# EAGLE board mippe_mobo (EAGLE 9.5.2)
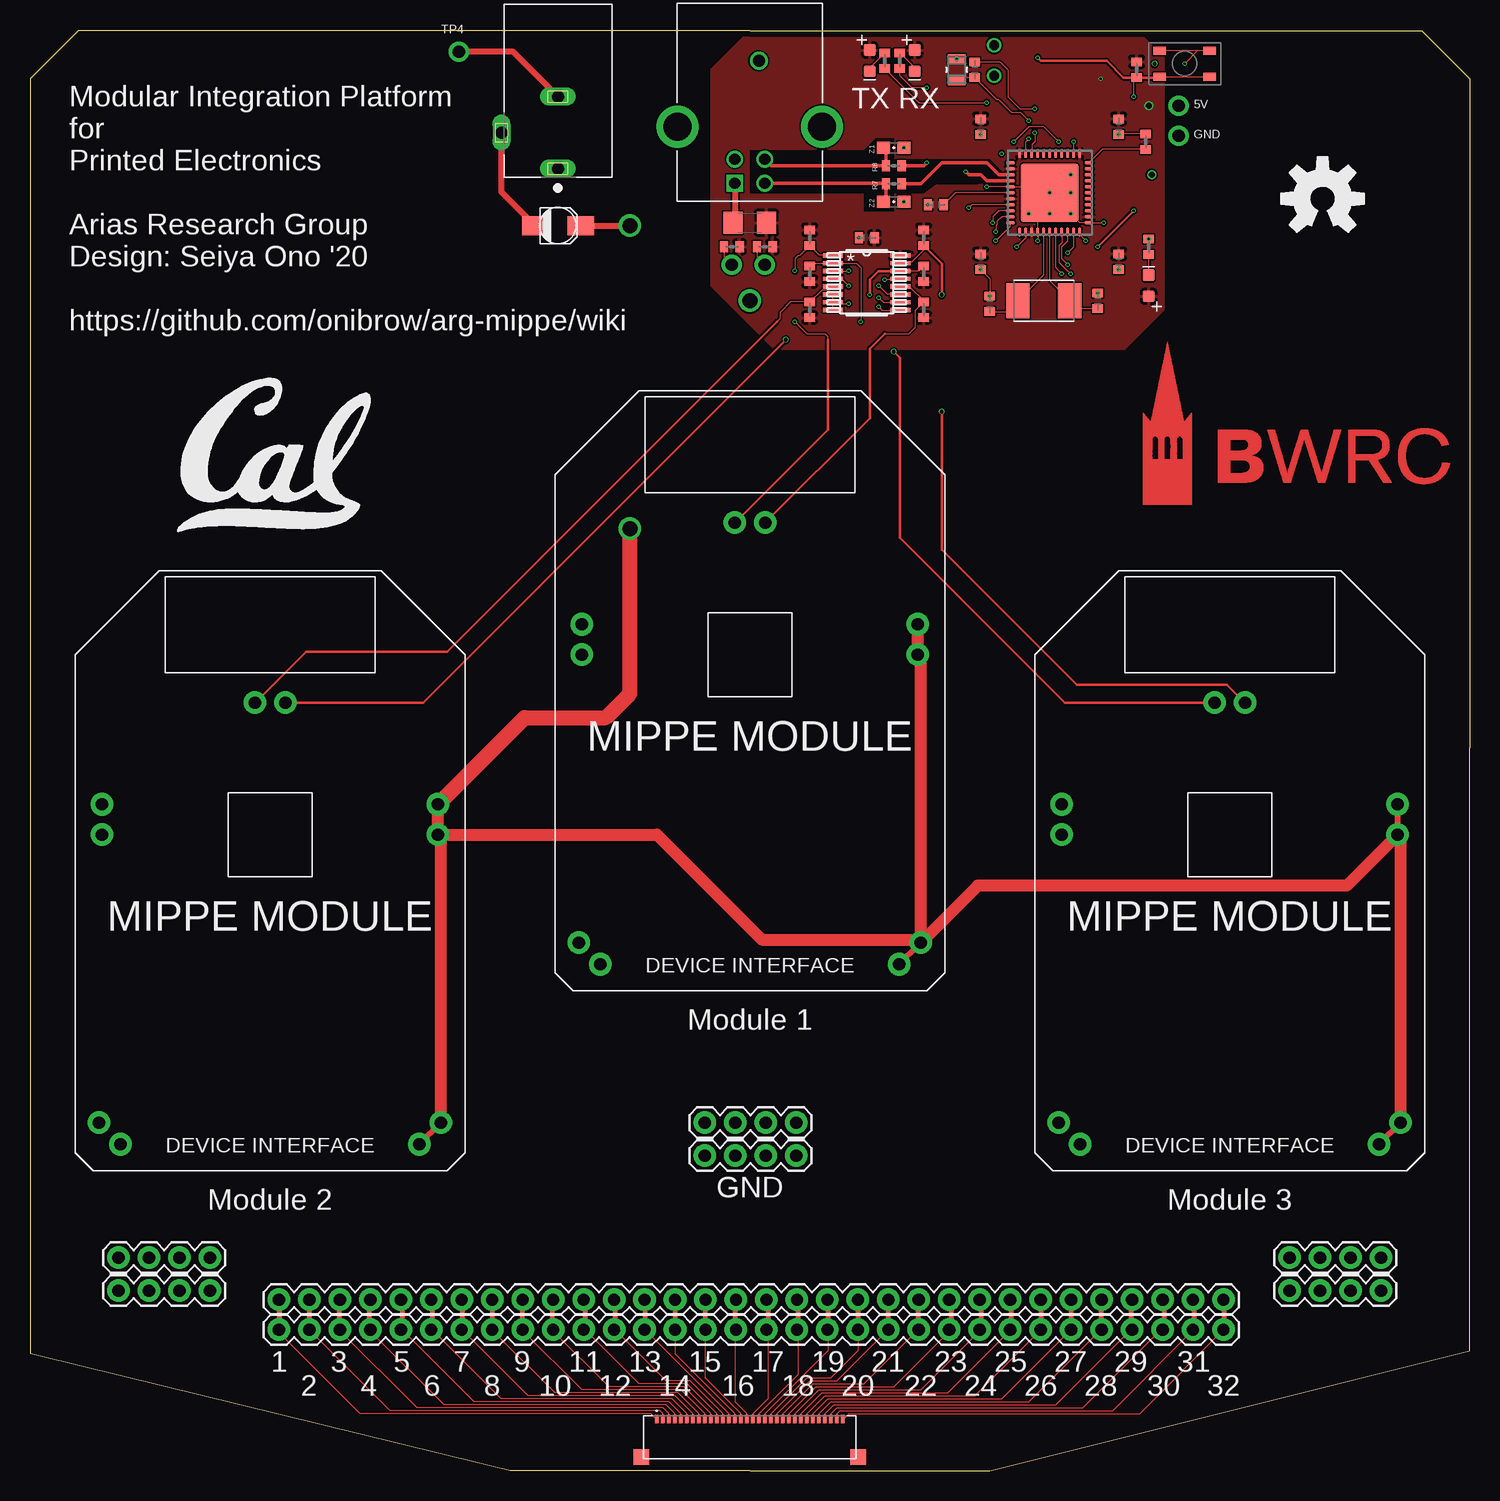
[diagram p0: board, top side]
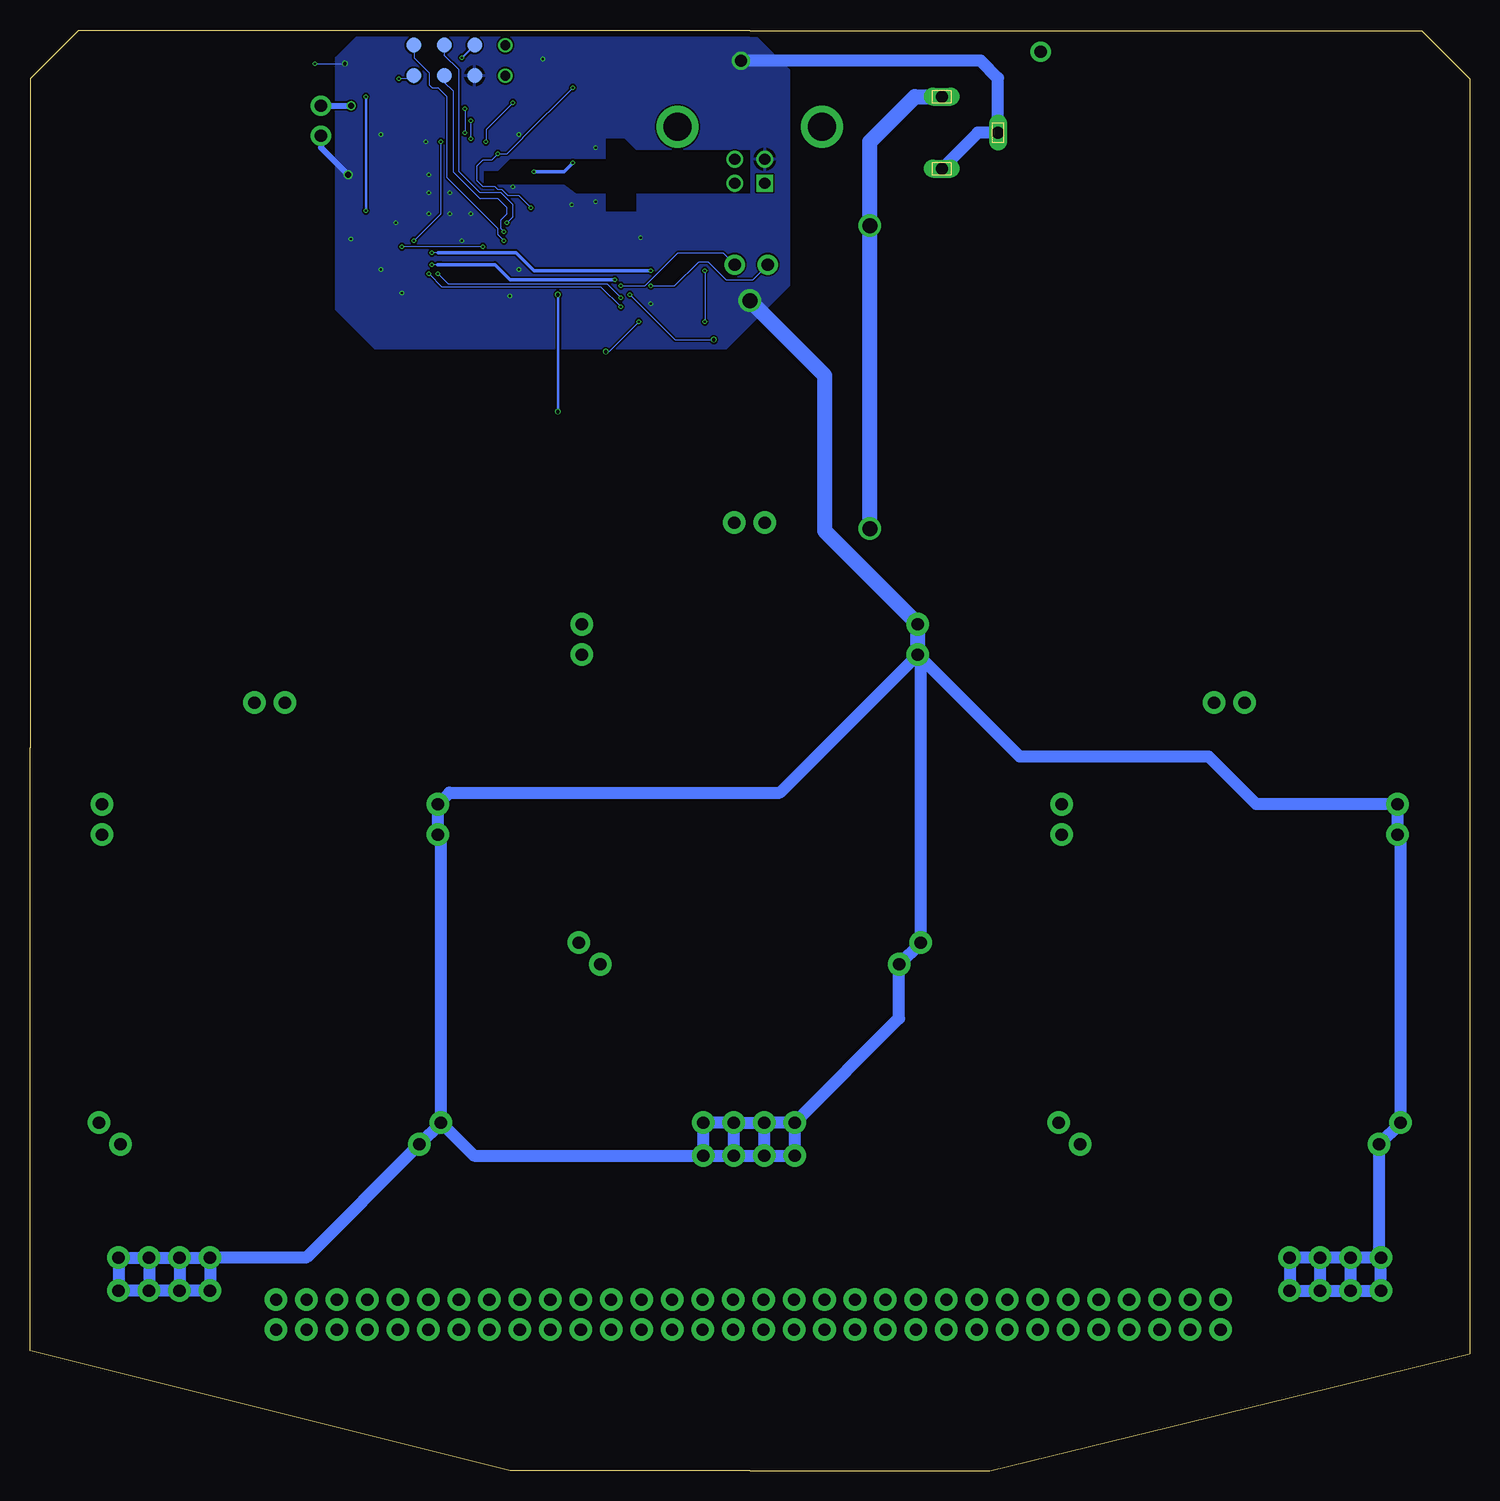
[diagram p1: board, bottom side, seen from below]

Size 120 x 120 mm. Coordinates in mm from the lower left corner, seen from the top.
Outline: 60,0 80,0 120,10 120,60.25 120,116 116,120 60,120 4,120 0,116 0,60 0,9.75 40,0 60,0
Copper layers (1*16): Top 2mil / dielectric 9mil / Bottom 2mil
Design rules "scono": minimum track width 3.5mil, minimum drill 0.2mm, track to track 5.5mil, track to pad 5.5mil, pad to pad 5.5mil, via to via 5.5mil, smd to smd 0mil, copper to edge 0.5mm, drill to drill 0.5mm, minimum pad ring 3mil, minimum via ring 3mil, stop-mask expansion 3mil, vias tented up to drill 0mil, thermal gap 10mil
Net classes: 1 supply: width 0.152 mm, drill 0.152 mm, clearance 0.152 mm
bKeepout: 1 lines
tRestrict: 23 lines
bRestrict: 24 lines

## Footprints (pad centres in the part's own frame; a part is rotated, then mirrored left to right if it is on the bottom)
MIPPE_MOD = drill 1.016 pad 1.88: GND@0 -12.454,2.204; GND@1 -14.25,4; GND@2 -14,28; GND@3 -14,30.54; RX -1.25,39; TX 1.29,39; VCC@0 12.454,2.204; VCC@1 14.25,4; VCC@2 14,28; VCC@3 14,30.54
0402-CAP = smd 0.7 x 0.9: 1 -0.65,0; 2 0.65,0
CAP_3MM = smd 1.6 x 2.2: NEG 0,-1.9; POS 0,1.9
LED-0603 = smd 1 x 1: A 0.877,0; C -0.877,0
1206 = smd 1.6 x 1.8: 1 -1.4,0; 2 1.4,0
1X32 = drill 1.016 pad 1.88: 1 0,0; 2 2.54,0; 3 5.08,0; 4 7.62,0; 5 10.16,0; 6 12.7,0; 7 15.24,0; 8 17.78,0; 9 20.32,0; 10 22.86,0; 11 25.4,0; 12 27.94,0; 13 30.48,0; 14 33.02,0; 15 35.56,0; 16 38.1,0; 17 40.64,0; 18 43.18,0; 19 45.72,0; 20 48.26,0; 21 50.8,0; 22 53.34,0; 23 55.88,0; 24 58.42,0; 25 60.96,0; 26 63.5,0; 27 66.04,0; 28 68.58,0; 29 71.12,0; 30 73.66,0; 31 76.2,0; 32 78.74,0
MOLEX_503480-3200 = smd 0.3 x 0.7: 1 -7.75,1.8; 2 -7.25,1.8; 3 -6.75,1.8; 4 -6.25,1.8; 5 -5.75,1.8; 6 -5.25,1.8; 7 -4.75,1.8; 8 -4.25,1.8; 9 -3.75,1.8; 10 -3.25,1.8; 11 -2.75,1.8; 12 -2.25,1.8; 13 -1.75,1.8; 14 -1.25,1.8; 15 -0.75,1.8; 16 -0.25,1.8; 17 0.25,1.8; 18 0.75,1.8; 19 1.25,1.8; 20 1.75,1.8; 21 2.25,1.8; 22 2.75,1.8; 23 3.25,1.8; 24 3.75,1.8; 25 4.25,1.8; 26 4.75,1.8; 27 5.25,1.8; 28 5.75,1.8; 29 6.25,1.8; 30 6.75,1.8; 31 7.25,1.8; 32 7.75,1.8 | smd 1.27 x 1.27: SH1 -9.04,-1.35; SH2 9.04,-1.35
CUI_PJ-102AH = drill 1 long: 1 -6.5,0; 2 -0.5,0; 3 -3.5,4.7
BURNIN = smd 1.27 x 1.27 bottom: 3.3V 0,0; GND -5.08,0; MISO 0,2.54; MOSI -2.54,0; RST -5.08,2.54; SCK -2.54,2.54 | drill 0.8: P$7 -7.62,2.54; P$8 -7.62,0
1X04 = drill 1.016 pad 1.88: 1 0,0; 2 2.54,0; 3 5.08,0; 4 7.62,0
IND_2012 = smd 0.803 x 1.45: 1 -0.902,0; 2 0.902,0
R0402 = smd 0.7 x 0.9: 1 -0.65,0; 2 0.65,0
BTN_PTS810 = smd 1.05 x 0.65: 1 -2.075,1.075; 2 2.075,1.075; 3 -2.075,-1.075; 4 2.075,-1.075
TEST_POINT = drill 1.016 pad 1.676: 1 0,0
PW16 = smd 1.676 x 0.356: 1 -2.819,2.275; 2 -2.819,1.625; 3 -2.819,0.975; 4 -2.819,0.325; 5 -2.819,-0.325; 6 -2.819,-0.975; 7 -2.819,-1.625; 8 -2.819,-2.275; 9 2.819,-2.275; 10 2.819,-1.625; 11 2.819,-0.975; 12 2.819,-0.325; 13 2.819,0.325; 14 2.819,0.975; 15 2.819,1.625; 16 2.819,2.275
QFN44ML7X7 = smd 0.75 x 0.275: 1 -3.275,2.5; 2 -3.275,2; 3 -3.275,1.5; 4 -3.275,1; 5 -3.275,0.5; 6 -3.275,0; 7 -3.275,-0.5; 8 -3.275,-1; 9 -3.275,-1.5; 10 -3.275,-2; 11 -3.275,-2.5; 23 3.275,-2.5; 24 3.275,-2; 25 3.275,-1.5; 26 3.275,-1; 27 3.275,-0.5; 28 3.275,0; 29 3.275,0.5; 30 3.275,1; 31 3.275,1.5; 32 3.275,2; 33 3.275,2.5 | smd 0.275 x 0.75: 12 -2.5,-3.275; 13 -2,-3.275; 14 -1.5,-3.275; 15 -1,-3.275; 16 -0.5,-3.275; 17 0,-3.275; 18 0.5,-3.275; 19 1,-3.275; 20 1.5,-3.275; 21 2,-3.275; 22 2.5,-3.275; 34 2.5,3.275; 35 2,3.275; 36 1.5,3.275; 37 1,3.275; 38 0.5,3.275; 39 0,3.275; 40 -0.5,3.275; 41 -1,3.275; 42 -1.5,3.275; 43 -2,3.275; 44 -2.5,3.275 | smd 4.826 x 4.826: EXP 0,0
OST_USB-B1HSB6 = drill 0.92 square: 1 1.25,4.71 | drill 0.92: 2 -1.25,4.71; 3 -1.25,2.71; 4 1.25,2.71 | drill 2.33: P1 -6.02,0; P2 6.02,0
XTAL500X320X130N = smd 1.95 x 2.95: 1 -2.15,0; 2 2.15,0
0603-RES = smd 1.1 x 1: 1 -0.85,0; 2 0.85,0

## Placement (x,y rotation side)
B1  [MIPPE_MOD]  60,40 0 top
B2  [MIPPE_MOD]  20,25 0 top
B3  [MIPPE_MOD]  100,25 0 top
C1  0.1uF  [0402-CAP]  69.75,102.75 0 top
C2  0.1uF  [0402-CAP]  90.75,112 90 top
C3  0.1uF  [0402-CAP]  78.75,116.75 90 top
C4  0.1uF  [0402-CAP]  90.75,100.75 90 top
C5  1uF  [0402-CAP]  79.25,112 90 top
C6  1uF  [0402-CAP]  79.25,100.75 90 top
C7  1uF  [0402-CAP]  75.5,105.5 0 top
C8  [CAP_3MM]  44,103.75 270 top
C9  18pF  [0402-CAP]  89,97.5 270 top
C10  18pF  [0402-CAP]  80,97.25 270 top
D1  [LED-0603]  93.25,98.75 270 top
D2  [LED-0603]  70,117.5 90 top
D3  [LED-0603]  73.75,117.5 90 top
F1  500mA  [1206]  60,104 0 top
J1  [1X32]  20.75,14.25 0 top
J2  [1X32]  20.75,11.75 0 top
J3  FFC-32  [MOLEX_503480-3200]  60,2.5 0 top
J4  PJ-102AH  [CUI_PJ-102AH]  44,115 90 top
J5  BURNIN  [BURNIN]  88,116.25 0 top
J6  [1X04]  56.25,26.25 0 top
J7  [1X04]  56.25,29 0 top
J8  [1X04]  15,15 180 top
J9  [1X04]  15,17.75 180 top
J10  [1X04]  105,17.75 0 top
J11  [1X04]  105,15 0 top
L1  UCB_CAL500MIL  [UCB_CAL_500MIL]  12.25,78.25 0 top
L2  [IND_2012]  77.25,116.75 270 top
R1  10k  [R0402]  65,102.75 270 top
R2  10k  [R0402]  74.5,96.75 90 top
R3  10k  [R0402]  65,96.75 90 top
R4  10k  [R0402]  74.5,99.75 90 top
R5  10k  [R0402]  65,99.75 90 top
R6  10k  [R0402]  74.5,102.75 270 top
R7  22R  [R0402]  72,107.25 0 top
R8  22R  [R0402]  72,108.75 0 top
R9  10k  [R0402]  93,110.75 90 top
R10  10k  [R0402]  92.25,116.75 90 top
R11  330R  [R0402]  71.25,117.5 90 top
R12  330R  [R0402]  72.5,117.5 90 top
R13  10k  [R0402]  61.25,102 0 top
R14  10k  [R0402]  58.5,102 0 top
R15  330R  [R0402]  93.25,102 270 top
SW1  BTN-PTS810  [BTN_PTS810]  96.25,117.25 0 top
TP1  TEST_POINTTHRU  [TEST_POINT]  58.5,100.5 0 top
TP2  TEST_POINTTHRU  [TEST_POINT]  61.25,100.5 0 top
TP3  TEST_POINTTHRU  [TEST_POINT]  95.75,111.25 0 top
TP4  TEST_POINTTHRU  [TEST_POINT]  35.75,118.25 0 top
TP5  TEST_POINTTHRU  [TEST_POINT]  95.75,113.75 0 top
U1  CD4052BPWR  [PW16]  69.75,99 0 top
U3  ATMEGA32U4-XUMU  [QFN44ML7X7]  85,106.5 0 top
U$17  [OSHW-LOGO-L]  107.75,106 0 top
X1  USB-B1HSB6  [OST_USB-B1HSB6]  60,112 180 top
Y1  16MHz  [XTAL500X320X130N]  84.5,97.5 180 top
Z1  CG0603MLC-05E  [0603-RES]  72,110.25 0 top
Z2  CG0603MLC-05E  [0603-RES]  72,105.75 0 top

## Library data of the parts
B1-B3 C8 D1-D3 F1 J1 J2 J5 L1 R1-R15 SW1 TP1-TP5 U3 Y1 Z1 Z2 = scono
C1-C7 C9 C10 = scono; PIE-INT-REF-NUM: CAPACITOR-GENERIC
J3 = scono; DESCRIPTION: 0.50mm Pitch Easy-On™ BackFlip™ Type FPC Connector, 1.00mm Height, Right Angle, Surface Mount, Dual Contact Style, 32...; DIGI-KEY_PART_NUMBER: WM11115CT-ND; DIGI-KEY_PURCHASE_URL: https://www.digikey.com/product-detail/en/molex/5034803200/WM11115CT-ND/5171273?utm_source=snapeda&utm_medium=aggregator&utm_campaign=symbol; MF: Molex; MP: 5034803200; PACKAGE: None
J4 = scono; AVAILABILITY: Unavailable; CUI_PURCHASE_URL: https://www.cuidevices.com/product/interconnect/connectors/dc-power-connectors/jacks/pj-102ah?utm_source=snapeda.com&utm_medium=referral&utm_campaign=snapedaBOM; DESCRIPTION: 2.0 x 6.5 mm, 5.0 A, Horizontal, Through Hole, Tapered Pins, Dc Power Jack Connector; MF: CUI Devices; MP: PJ-102AH; PACKAGE: None; PRICE: None
J6-J11 = scono; PROD_ID: CONN-09696
L2 = scono; MANUFACTURER_PART_NUMBER: MLZ2012M1R0HT000; VENDOR: TDK
U1 = scono; BUILT_BY: EMA_UL_Team; MANUFACTURER: Texas Instruments; MANUFACTURER_PART_NUMBER: CD4052BPWR; VENDOR: Vendor
U$17 = pie
X1 = scono; DESCRIPTION: USB - B Receptacle Connector 4 Position Through Hole, Right Angle; DIGI-KEY_PART_NUMBER: ED2983-ND; DIGI-KEY_PURCHASE_URL: https://www.digikey.com/product-detail/en/on-shore-technology-inc/USB-B1HSB6/ED2983-ND/2677744?utm_source=snapeda&utm_medium=aggregator&utm_campaign=symbol; MF: On Shore; MP: USB-B1HSB6; PACKAGE: None

## Nets
5V: C1.2 C2.2 C4.2 C5.2 C6.2 D1.A D2.A D3.A F1.2 J5.3.3V R1.1 R2.1 R3.1 R4.1 R5.1 R6.1 R10.2 R13.2 R14.2 TP5.1 U1.16 U3.2 U3.7 U3.14 U3.24 U3.34 U3.44
A: U1.10 U3.18
AGND: C3.1 L2.2 U3.43
AREF: C3.2 U3.42
B: U1.9 U3.19
D_N: R7.1 X1.2 Z2.1
D_P: R8.1 X1.3 Z1.1
GND: B1.GND@0 B1.GND@1 B1.GND@2 B1.GND@3 B2.GND@0 B2.GND@1 B2.GND@2 B2.GND@3 B3.GND@0 B3.GND@1 B3.GND@2 B3.GND@3 C1.1 C2.1 C4.1 C5.1 C6.1 C7.1 C8.NEG C9.1 C10.1 J4.1 J4.3 J5.GND J6.1 J6.2 J6.3 J6.4 J7.1 J7.2 J7.3 J7.4 J8.1 J8.2 J8.3 J8.4 J9.1 J9.2 J9.3 J9.4 J10.1 J10.2 J10.3 J10.4 J11.1 J11.2 J11.3 J11.4 L2.1 R9.2 R15.1 SW1.1 SW1.2 TP3.1 U1.6 U1.7 U1.8 U3.5 U3.15 U3.23 U3.35 U3.EXP X1.4 Z1.2 Z2.2
HWB: R9.1 U3.33
MISO: J5.MISO U3.11
MOSI: J5.MOSI U3.10
N$1: J1.1 J2.1 J3.1
N$2: J1.2 J2.2 J3.2
N$3: J1.3 J2.3 J3.3
N$4: J1.4 J2.4 J3.4
N$5: J1.5 J2.5 J3.5
N$6: J1.6 J2.6 J3.6
N$7: J1.7 J2.7 J3.7
N$8: J1.8 J2.8 J3.8
N$9: J1.9 J2.9 J3.9
N$10: J1.10 J2.10 J3.10
N$11: J1.11 J2.11 J3.11
N$12: J1.12 J2.12 J3.12
N$13: J1.13 J2.13 J3.13
N$14: J1.14 J2.14 J3.14
N$15: J1.15 J2.15 J3.15
N$16: J1.16 J2.16 J3.16
N$17: J1.17 J2.17 J3.17
N$18: J1.18 J2.18 J3.18
N$19: J1.19 J2.19 J3.19
N$20: J1.20 J2.20 J3.20
N$21: J1.21 J2.21 J3.21
N$22: J1.22 J2.22 J3.22
N$23: J1.23 J2.23 J3.23
N$24: J1.24 J2.24 J3.24
N$25: J1.25 J2.25 J3.25
N$26: J1.26 J2.26 J3.26
N$27: J1.27 J2.27 J3.27
N$28: J1.28 J2.28 J3.28
N$29: J1.29 J2.29 J3.29
N$30: J1.30 J2.30 J3.30
N$31: J1.31 J2.31 J3.31
N$32: J1.32 J2.32 J3.32
N$33: D2.C R11.2
N$34: D3.C R12.2
N$35: D1.C R15.2
RD_N: R7.2 U3.3
RD_P: R8.2 U3.4
RESET: J5.RST R10.1 SW1.3 SW1.4 U3.13
RX: U1.13 U3.20
RX1: B1.RX R1.2 U1.1
RX2: B2.RX R3.2 U1.5
RX3: B3.RX R5.2 U1.2
RX4: R14.1 TP1.1 U1.4
RXLED: R12.1 U3.8
SCK: J5.SCK U3.9
TX: U1.3 U3.21
TX1: B1.TX R2.2 U1.12
TX2: B2.TX R4.2 U1.14
TX3: B3.TX R6.2 U1.15
TX4: R13.1 TP2.1 U1.11
TXLED: R11.1 U3.22
UCAP: C7.2 U3.6
VCC: B1.VCC@0 B1.VCC@1 B1.VCC@2 B1.VCC@3 B2.VCC@0 B2.VCC@1 B2.VCC@2 B2.VCC@3 B3.VCC@0 B3.VCC@1 B3.VCC@2 B3.VCC@3 C8.POS J4.2 TP4.1
XTAL1: C9.2 U3.17 Y1.1
XTAL2: C10.2 U3.16 Y1.2
XUSB: F1.1 X1.1

## Tracks (layer width: path | path; a pad name or v marks a point on that pad's centre or on a via)
5V  (via drill 0.2, 0.5)
  Bottom 0.1: J5.3.3V 88.25,116 v89.25,116
  Bottom 0.5: TP5.1 v93.25,113.75
  pour Top: 56.75,116.75 56.75,98.75 62,93.5 91.25,93.5 94.5,96.75 94.5,117.75 92.25,120 60,120
A  (via drill 0.2)
  Top 0.1: v70.75,97.75 71.12,97.38 U1.10 | U3.18 85.5,100.25 v86,99.75
  Bottom 0.1: v86,99.75 85.16,98.91 71.91,98.91 v70.75,97.75
AGND  (via drill 0.2)
  Top 0.1: L2.2 77.5,116.1 C3.1 80.6,114.25 80.75,114.25 81.84,113.16 82.59,113.16 v83.25,112.5 | U3.43 83,110.75 v83.25,111
  Bottom 0.1: v83.25,111 v83.25,112.5
AREF  (via drill 0.2)
  Top 0.1: C3.2 80.85,117.4 81.5,116.75 81.5,114.5 82.5,113.5 v83.75,113.5 | v83.75,111.5 83.75,110.75 83.5,110.5 U3.42
  Bottom 0.1: v83.75,113.5 v83.75,111.5
B  (via drill 0.2)
  Top 0.1: v70.75,97 71.03,96.72 U1.9 | U3.19 86,102.34 85.76,102.1 85.76,100.72 86.35,100.13 86.37,100.13 v86.75,99.75
  Bottom 0.1: v86.75,99.75 85.67,98.67 72.42,98.67 v70.75,97
D_N
  Top 0.1: 71.35,105.95 Z2.1 | 71.31,107.29 R7.1
  Top 0.3: R7.1 71.35,105.95 | X1.2 71.31,107.29
D_P
  Top 0.1: Z1.1 71.35,110.05
  Top 0.3: 71.35,110.05 R8.1 61.79,108.75 X1.3
GND  (via drill 0.2, 0.3, 0.5, 1, 1.25 pad 1)
  Top 0.1: SW1.1 SW1.2 97.33,118.33 v96.25,117.25 | R9.2 90.8,111.4 C2.1 | U1.8 U1.7 | U1.7 U1.6 | U1.7 67.06,97.25 v68.25,97.25 | C6.1 80,99.35 C10.1 | v84,102.5 U3.15 84,105.5 U3.EXP | U3.35 v87,110.75 | v79.75,107 U3.5 84.5,107 U3.EXP | v89.5,104 U3.23 87.5,104 v86.75,104.75 | U3.EXP v86.75,106.5
  Top 0.5: C8.NEG 39.3,106.55 J4.3
  Bottom 0.1: v96.25,117.25 v93.75,117.25
  Bottom 0.5: 45.75,67.75 45.88,67.88 B1.GND@2 | 5.75,52.75 B2.GND@2 | TP3.1 95.75,110.25 v93.5,108
  Bottom 1: B3.GND@1 B3.GND@0 97,17.75 J10.1 | B3.GND@1 85.75,52.75 B3.GND@2 B3.GND@3 85.04,56.5 57.5,56.5 B1.GND@2 | 45.75,67.75 B1.GND@1 B1.GND@0 47.55,37.7 J7.1 | 5.75,52.75 B2.GND@1 B2.GND@0 7.55,17.92 J9.4 | B2.GND@2 B2.GND@3 17.79,55.54 21.75,59.5 37.5,59.5 45.88,67.88 | J4.1 41,111.5 J4.3 39.3,116.05 40.75,117.5 v60.75,117.5 | B3.GND@1 83,26.25 J6.4 | J6.4 J6.3 | J6.3 J6.2 | J6.2 J6.1 J7.1 | J6.2 J7.2 J7.3 | J6.3 J7.3 | J6.4 J7.4 J7.3 | J9.4 J9.3 | J9.3 J9.2 | J9.2 J9.1 J8.1 J8.2 | J8.2 J8.3 | J8.3 J8.4 J9.4 | J9.3 J8.3 | J9.2 J8.2 | J10.1 J11.1 J11.2 | J10.2 J11.2 | J10.3 J11.3 | J11.2 J11.3 | J11.3 J11.4 J10.4 J10.3 | J10.3 J10.2 | J10.2 J10.1 | J7.1 58.25,29
  Bottom 1.25: B1.GND@2 B1.GND@3 53.75,78.29 53.75,91.25 v60,97.5
  other vias: 85,106.5 90.75,111.35 72.85,105.75 72.85,110.25 79.25,100.1 90.75,100.1 89,98.15 80,97.9 69.1,102.75 77.25,117.65 79.25,111.35 83.25,104.75 85,104.75 86.75,108 93.25,102.65 74.85,105.5
  pour Bottom: 56.75,116.75 56.75,98.75 62,93.5 91.25,93.5 94.5,96.75 94.5,117.75 92.25,120 60,120
HWB
  Top 0.1: R9.1 92.92,110.17 89.45,110.17 U3.33
MISO  (via drill 0.2)
  Top 0.1: v80.5,102.5 81.72,103.72 U3.11
  Bottom 0.1: J5.MISO 88,117.75 86.75,116.5 86.75,115.5 86.5,115.25 86,115.25 85.25,114.5 85.25,107.75 81,103.5 81,103 v80.5,102.5
MOSI  (via drill 0.2)
  Top 0.1: U3.10 81,104.5 80.62,104.12 80.62,103.85 80.5,103.73 v80.5,103.25
  Bottom 0.1: J5.MOSI 85.46,115.71 84.75,115 84.75,108.25 82.5,106 81,106 80.25,105.25 80.25,104.75 80.75,104.25 80.75,103.5 v80.5,103.25
N$1
  Top 0.1: J3.1 52.2,4.3 51.75,4.75 27.5,4.75 20.75,11.5 J2.1
  Top 0.4: J1.1 J2.1
N$2
  Top 0.1: J3.2 52.75,4.75 52.5,5 30,5 23.25,11.75
  Top 0.4: J1.2 23.25,14.21 23.25,11.75 J2.2
N$3
  Top 0.1: J3.3 53.25,4.75 52.75,5.25 52.5,5.25 32.25,5.25 25.83,11.67 J2.3
  Top 0.4: J1.3 25.75,14.17 25.75,11.83 J2.3
N$4
  Top 0.1: J3.4 53.75,4.75 53,5.5 34.5,5.5 28.37,11.63 J2.4
  Top 0.4: J1.4 28.25,14.13 28.25,11.87 J2.4
N$5
  Top 0.1: J3.5 54.25,4.75 53.25,5.75 37,5.75 31,11.75 J2.5
  Top 0.4: J1.5 31,14.16 31,11.84 J2.5
N$6
  Top 0.1: J3.6 54.75,4.75 53.5,6 39.25,6 33.5,11.75 J2.6
  Top 0.4: J1.6 33.5,14.2 33.5,11.8 J2.6
N$7
  Top 0.1: J3.7 55.25,4.75 53.75,6.25 41.5,6.25 J2.7
  Top 0.4: J1.7 J2.7
N$8
  Top 0.1: J3.8 55.75,4.75 54,6.5 45.5,6.5 43.75,6.5 38.53,11.72 J2.8
  Top 0.4: J1.8 38.5,14.22 38.5,11.78 J2.8
N$9
  Top 0.1: J3.9 56.25,4.75 54.25,6.75 46,6.75 41.07,11.68 J2.9
  Top 0.4: J1.9 41,14.18 41,11.82 J2.9
N$10
  Top 0.1: J3.10 56.75,4.75 54.5,7 48.25,7 43.61,11.64 J2.10
  Top 0.4: J1.10 43.5,14.14 43.5,11.86 J2.10
N$11
  Top 0.1: J3.11 57.25,4.75 54.75,7.25 50.75,7.25 46.25,11.75 J2.11
  Top 0.4: J1.11 46.25,14.15 46.25,11.85 J2.11
N$12
  Top 0.1: J3.12 57.75,4.75 55,7.5 53,7.5 48.75,11.75 J2.12
  Top 0.4: J1.12 48.75,14.19 48.75,11.81 J2.12
N$13
  Top 0.1: J2.13 51.25,11.75 55.25,7.75 58.25,4.75 J3.13
  Top 0.4: J1.13 51.25,14.23 51.25,11.77 J2.13
N$14
  Top 0.1: J3.14 58.75,4.75 53.75,9.75 53.75,11.73 J2.14
  Top 0.4: J1.14 53.75,14.23 53.75,11.77 J2.14
N$15
  Top 0.1: J3.15 59.25,4.75 56.25,7.75 56.25,11.69 J2.15
  Top 0.4: J1.15 56.25,14.19 56.25,11.81 J2.15
N$16
  Top 0.1: J2.16 58.8,11.7 58.8,5.7 59.75,4.75 J3.16
  Top 0.4: J1.16 58.75,14.15 58.75,11.85 J2.16
N$17
  Top 0.1: J3.17 60.25,4.75 61.5,6 61.5,11.64 J2.17
  Top 0.4: J1.17 61.5,14.14 61.5,11.86 J2.17
N$18
  Top 0.1: J3.18 60.75,4.75 64,8 64,11.68 J2.18
  Top 0.4: J1.18 64,14.18 64,11.82 J2.18
N$19
  Top 0.1: J3.19 61.25,4.75 66.5,10 66.5,11.72 J2.19
  Top 0.4: J1.19 66.5,14.22 66.5,11.78 J2.19
N$20
  Top 0.1: J3.20 61.75,4.75 64.75,7.75 66.75,7.75 69,10 J2.20
  Top 0.4: J1.20 J2.20
N$21
  Top 0.1: J3.21 62.25,4.75 65,7.5 67.25,7.5 71.5,11.75 J2.21
  Top 0.4: J1.21 71.5,14.2 71.5,11.8 J2.21
N$22
  Top 0.1: J2.22 74,11.75 69.5,7.25 65.25,7.25 62.75,4.75 J3.22
  Top 0.4: J2.22 74,11.84 74,14.16 J1.22
N$23
  Top 0.1: J3.23 63.25,4.75 65.5,7 72,7 76.63,11.63 J2.23
  Top 0.4: J1.23 76.75,14.13 76.75,11.87 J2.23
N$24
  Top 0.1: J3.24 63.75,4.75 65.75,6.75 74.25,6.75 79.17,11.67 J2.24
  Top 0.4: J1.24 79.25,14.17 79.25,11.83 J2.24
N$25
  Top 0.1: J3.25 64.25,4.75 66,6.5 76.5,6.5 81.71,11.71 J2.25
  Top 0.4: J1.25 81.75,14.21 81.75,11.79 J2.25
N$26
  Top 0.1: J3.26 64.75,4.75 66.25,6.25 78.75,6.25 J2.26
  Top 0.4: J1.26 J2.26
N$27
  Top 0.1: J3.27 65.25,4.75 66.5,6 81,6 86.75,11.75 J2.27
  Top 0.4: J1.27 86.75,14.21 86.75,11.79 J2.27
N$28
  Top 0.1: J3.28 65.75,4.75 66.75,5.75 83.25,5.75 89.25,11.75 J2.28
  Top 0.4: J1.28 89.25,14.17 89.25,11.83 J2.28
N$29
  Top 0.1: J3.29 66.25,4.75 67,5.5 85.5,5.5 91.75,11.75 J2.29
  Top 0.4: J1.29 91.75,14.13 91.75,11.87 J2.29
N$30
  Top 0.1: J3.30 66.75,4.75 67.25,5.25 87.75,5.25 94.25,11.75 94.5,11.75
  Top 0.4: J1.30 94.5,14.16 94.5,11.75 J2.30
N$31
  Top 0.1: J3.31 67.25,4.75 67.5,5 90.25,5 96.95,11.7 J2.31
  Top 0.4: J1.31 97,14.2 97,11.8 J2.31
N$32
  Top 0.1: J3.32 67.8,4.3 68.25,4.75 92.5,4.75 J2.32
  Top 0.4: J1.32 J2.32
N$33
  Top 0.1: D2.C 70,116.9 R11.2
N$34
  Top 0.1: R12.2 73.75,116.9 D3.C
N$35
  Top 0.1: D1.C R15.2
RD_N
  Top 0.3: R7.2 74.25,107.25 76,109 79.75,109 80.75,108 U3.3
RD_P  (via drill 0.2)
  Top 0.3: R8.2 74.5,108.75 v74.75,109 | v78,108.25 78.25,108 79.25,108 79.75,107.5 U3.4
  Bottom 0.3: v74.75,109 75.5,108.25 v78,108.25
RESET  (via drill 0.2)
  Top 0.1: 94.1,116.1 SW1.3 SW1.4 | U3.13 83,102.75 v82.25,102 | v92,114.5 92,115.85 R10.1
  Top 0.2: v84,117.75 84.25,117.5 89.75,117.5 91.15,116.1 R10.1 94.1,116.1 | v89,102 v92,105
  Bottom 0.1: v82.25,102 v89,102
  Bottom 0.2: J5.RST 83.96,117.75 v84,117.75 | v92,105 v92,114.5
RX  (via drill 0.2)
  Top 0.1: U1.13 72.49,99.25 v71.25,99.25 | v86.5,100.5 86,101 86,102 86.5,102.5 U3.20
  Bottom 0.1: 86.02,100.5 v86.5,100.5
  Bottom 0.3: 86.02,100.5 85.75,100.5 81.25,100.5 80,99.25 v71.25,99.25
RX1  (via drill 0.2)
  Top 0.1: U1.1 65.83,101.28 R1.2 64.15,101.25 64,101.25 63.75,101 v63.75,100 | v63.75,95.75 64.75,94.75 66.25,94.75 66.5,94.5 66.5,94.25
  Top 0.2: B1.RX 66.5,86.75 66.5,94.25
  Bottom 0.1: v63.75,100 v63.75,95.75
RX2
  Top 0.1: U1.5 66.65,98.39 66.01,98.39 65.02,97.4 R3.2 63.4,97.4 62.5,96.5 62.5,96 62.25,95.75
  Top 0.2: 62.25,95.75 34.75,68.25 23,68.25 B2.RX
RX3  (via drill 0.2, 0.3)
  Top 0.1: R5.2 65.22,100.62 U1.2 68.88,100.62 69.25,100.25 v69.25,95.75
  Top 0.2: B3.RX 86.25,64 72.5,77.75 72.5,89.25 72.5,92.75 v72,93.25
  Bottom 0.1: v69.25,95.75 71.75,93.25 v72,93.25
RX4  (via drill 0.2)
  Top 0.1: U1.4 67.66,99.33 v68.24,98.74 | R14.1 57.85,101.15 TP1.1
  Bottom 0.1: v68.24,98.74 66.26,98.74 64.25,100.75 63.5,100.75 62,99.25 59.75,99.25 TP1.1
RXLED  (via drill 0.2)
  Top 0.1: v74.75,115.25 73.5,115.25 72.5,116.25 R12.1 | U3.8 78.5,105.5 v78.25,105.25
  Bottom 0.1: v74.75,115.25 78.88,111.12 78.88,111.1 80.23,109.75 v81,109.75 81.5,109.25 82.25,109.25 82.75,108.75 82.75,107.5 82.25,107 81.25,107 80.99,106.74 80.65,106.74 80.16,106.25 79.25,106.25 v78.25,105.25
SCK  (via drill 0.2)
  Top 0.1: U3.9 80.75,105 80.25,104.5 v80.25,104
  Bottom 0.1: J5.SCK 85.46,117.96 84.25,116.75 84.25,108.25 82.5,106.5 80.75,106.5 79.75,105.5 79.75,104.5 v80.25,104
TX  (via drill 0.2)
  Top 0.1: U1.3 68.22,99.97 v68.25,100 | v86.5,101.5 87,102 U3.21
  Bottom 0.1: 86,101.5 v86.5,101.5
  Bottom 0.3: v68.25,100 78,100 79.5,101.5 86,101.5
TX1
  Top 0.1: U1.12 73.33,98.67 74.5,97.5 R2.2 73.75,96.65 73.75,95.25 73.25,94.75 71.25,94.75
  Top 0.2: B1.TX 70,87.71 70,93.5 71.25,94.75
TX2  (via drill 0.2, 0.3)
  Top 0.1: R4.2 74.08,99.97 U1.14
  Top 0.2: B2.TX 32.75,64 v63,94.25 | v70,98 70,99.25 70.72,99.97 U1.14
  Bottom 0.1: v70,98 66.25,94.25 v63,94.25
TX3  (via drill 0.3)
  Top 0.1: U1.15 72.69,100.75 73.5,100.75 74.5,101.75 R6.2
  Top 0.2: B3.TX 99.79,65.5 87.25,65.5 76,76.75 v76,88.25 | R6.2 76,100.6 v76,98
  Bottom 0.2: v76,98 v76,88.25
TX4  (via drill 0.2)
  Top 0.1: U1.11 71.47,98.03 v70.75,98.75 | R13.1 60.6,101.15 TP2.1
  Bottom 0.1: v70.75,98.75 68.75,98.75 66,101.5 62.25,101.5 TP2.1
TXLED  (via drill 0.2)
  Top 0.1: R11.1 74.1,114 v79.75,114 | U3.22 87.5,103 v88,102.5 | v85.75,110.75 84.5,112 83.25,112 v82,110.75
  Bottom 0.1: v79.75,114 82,111.75 v82,110.75 | v88,102.5 85.75,104.75 v85.75,110.75
UCAP
  Top 0.1: U3.6 77.15,106.5 C7.2
VCC  (via drill 1.25, 1.25 pad 1)
  Top 0.5: B2.VCC@0 B2.VCC@1 | 34.25,52.75 B2.VCC@2 | B1.VCC@0 74.12,43.88 B1.VCC@1 74,44.25 | 74.25,67.75 B1.VCC@2 | B3.VCC@0 B3.VCC@1 | 114.25,52.75 B3.VCC@2 B3.VCC@3 | C8.POS v50,103.75 | J4.2 40.25,118.25 TP4.1
  Top 1: B2.VCC@1 34.25,52.75 | B2.VCC@3 B2.VCC@2 52.25,53 61,44.25 74,44.25 | B1.VCC@1 74.25,67.75 | B1.VCC@2 B1.VCC@3 | B3.VCC@1 114.25,52.75 | B3.VCC@2 109.75,48.75 79,48.75 74.12,43.88
  Top 1.25: B2.VCC@3 41.21,62.75 48,62.75 50,64.75 v50,78.5
  Bottom 1.25: v50,78.5 50,100.5 v50,103.75 50,107.75 50,110.75 46.25,114.5 J4.2
XTAL1
  Top 0.1: C9.2 87.3,96.85 Y1.1 85,99.15 U3.17
XTAL2
  Top 0.1: C10.2 81.45,96.6 Y1.2 84.17,99.33 84.5,99.65 U3.16
XUSB
  Top 0.1: 58.75,104.15 F1.1
  Top 0.5: X1.1 58.75,104.15
(copper drawn outside any net)
  shapes: Top area x3946

## Text on the board
tPlace: TX RX | 5V | GND | Modular Integration Platform / for / Printed Electronics / / Arias Research Group / Design: Seiya Ono '20 / / https://github.com/onibrow/arg-mippe/wiki | Module 1 | Module 2 | Module 3 | GND | 1 | 3 | 5 | 7 | 9 | 11 | 13 | 15 | 17 | 19 | 21 | 23 | 25 | 27 | 29 | 31 | 2 | 4 | 6 | 8 | 10 | 12 | 14 | 16 | 18 | 20 | 22 | 24 | 26 | 28 | 30 | 32
bCream: Design by Seiya Fa'19